# EAGLE board ASD2301 (EAGLE 6.3)
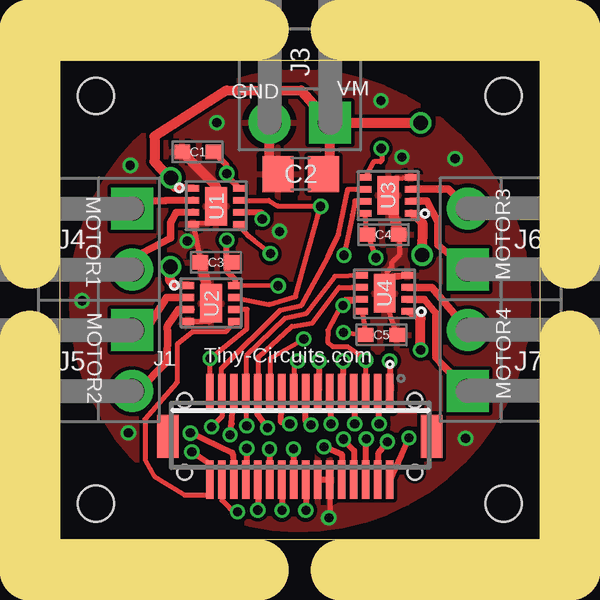
[diagram p0: board, top side]
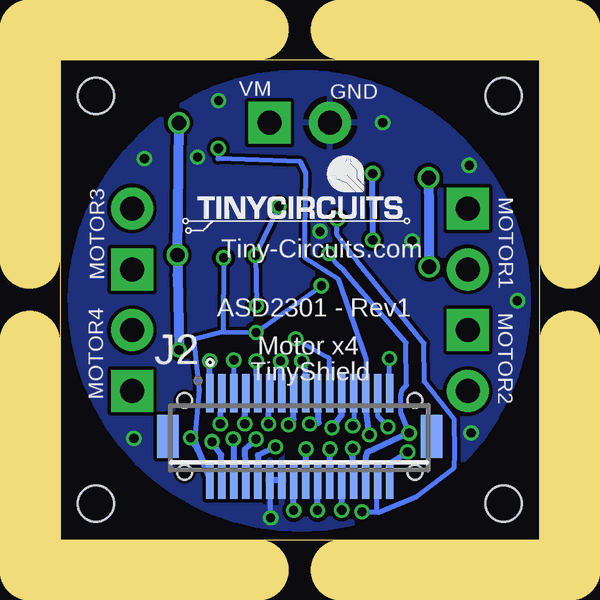
[diagram p1: board, bottom side, seen from below]

Size 20 x 20 mm. Coordinates in mm from the lower left corner, seen from the top.
Outline: 0,20 20,20 20,0 0,0 0,20
Copper layers (1*16): Top 0.035mm / dielectric 1.5mm / Bottom 0.035mm
Design rules "default *": minimum track width 8mil, minimum drill 15mil, track to track 6mil, track to pad 6mil, pad to pad 6mil, via to via 6mil, smd to smd 6mil, copper to edge 6mil, drill to drill 8mil, minimum pad ring 10mil, minimum via ring 5mil, stop-mask expansion 4mil, vias tented up to drill 25mil, thermal gap 10mil
Holes 1.5 mm at 1.5,18.5 18.5,18.5 18.5,1.5 1.5,1.5
Milling: 8 lines

## Footprints (pad centres in the part's own frame; a part is rotated, then mirrored left to right if it is on the bottom)
C0402 = smd 0.65 x 0.6: 1 -0.65,0; 2 0.65,0
C0805 = smd 1.3 x 1.5: 1 -0.95,0; 2 0.95,0
DF12-32-DP = smd 0.3 x 1.6: 1 -3.75,-1.8; 2 -3.75,1.8; 3 -3.25,-1.8; 4 -3.25,1.8; 5 -2.75,-1.8; 6 -2.75,1.8; 7 -2.25,-1.8; 8 -2.25,1.8; 9 -1.75,-1.8; 10 -1.75,1.8; 11 -1.25,-1.8; 12 -1.25,1.8; 13 -0.75,-1.8; 14 -0.75,1.8; 15 -0.25,-1.8; 16 -0.25,1.8; 17 0.25,-1.8; 18 0.25,1.8; 19 0.75,-1.8; 20 0.75,1.8; 21 1.25,-1.8; 22 1.25,1.8; 23 1.75,-1.8; 24 1.75,1.8; 25 2.25,-1.8; 26 2.25,1.8; 27 2.75,-1.8; 28 2.75,1.8; 29 3.25,-1.8; 30 3.25,1.8; 31 3.75,-1.8; 32 3.75,1.8 | smd 0.9 x 1.8: F1 -5.5,0; F2 5.5,0 | hole 0.6: -4.8,1.5; 4.8,1.5
DF12-32-DS = smd 0.3 x 1.6: 1 -3.75,1.8; 2 -3.75,-1.8; 3 -3.25,1.8; 4 -3.25,-1.8; 5 -2.75,1.8; 6 -2.75,-1.8; 7 -2.25,1.8; 8 -2.25,-1.8; 9 -1.75,1.8; 10 -1.75,-1.8; 11 -1.25,1.8; 12 -1.25,-1.8; 13 -0.75,1.8; 14 -0.75,-1.8; 15 -0.25,1.8; 16 -0.25,-1.8; 17 0.25,1.8; 18 0.25,-1.8; 19 0.75,1.8; 20 0.75,-1.8; 21 1.25,1.8; 22 1.25,-1.8; 23 1.75,1.8; 24 1.75,-1.8; 25 2.25,1.8; 26 2.25,-1.8; 27 2.75,1.8; 28 2.75,-1.8; 29 3.25,1.8; 30 3.25,-1.8; 31 3.75,1.8; 32 3.75,-1.8 | smd 0.9 x 1.8: F1 -5.5,0; F2 5.5,0 | hole 0.6: -4.8,1.5; 4.8,1.5
1X2_.1_RA_TH_HEADER = drill 1 pad 1.75 square: 1 0,1.27 | drill 1 pad 1.75: 2 0,-1.27
WSON-8 = smd 0.28 x 0.5: 1 -0.75,-0.95; 2 -0.25,-0.95; 3 0.25,-0.95; 4 0.75,-0.95; 5 0.75,0.95; 6 0.25,0.95; 7 -0.25,0.95; 8 -0.75,0.95 | smd 1.6 x 0.9: 9 0,0

## Placement (x,y rotation side)
C1  0.1uF  [C0402]  5.75,16.16 180 top
C2  10uF  [C0805]  10.04,15.25 180 top
C3  0.1uF  [C0402]  6.5,11.56 180 top
C4  0.1uF  [C0402]  13.48,12.72 0 top
C5  0.1uF  [C0402]  13.41,8.53 0 top
J1  DF12-32-DP  [DF12-32-DP]  10,4.3 180 top
J2  DF12-32-DS  [DF12-32-DS]  10,4.3 0 bottom
J3  961102  [1X2_.1_RA_TH_HEADER]  10,17.38 270 top
J4  961102  [1X2_.1_RA_TH_HEADER]  3,12.54 0 top
J5  961102  [1X2_.1_RA_TH_HEADER]  3,7.46 0 top
J6  961102  [1X2_.1_RA_TH_HEADER]  17,12.54 180 top
J7  961102  [1X2_.1_RA_TH_HEADER]  17,7.46 180 top
U1  DRV8837  [WSON-8]  6.51,13.9 270 top
U2  DRV8837  [WSON-8]  6.3,9.85 270 top
U3  DRV8837  [WSON-8]  13.69,14.36 90 top
U4  DRV8837  [WSON-8]  13.54,10.27 90 top
U$1  [DOCFIELD-TINYCIRCUITS-PCB]  33.91,-10 0 top  (outside the outline)

## Library data of the parts
C1 C3-C5 = tinycircuits; PARTNO: AS-ITM-00008
C2 = tinycircuits; PARTNO: AS-ITM-00045
J1 = tinycircuits; PARTNO: AS-ITM-00015
J2 = tinycircuits; PARTNO: AS-ITM-00012
J3-J7 = tinycircuits; PARTNO: AS-ITM-00044
U1-U4 = tinycircuits; PARTNO: AS-ITM-00042
U$1 = tinycircuits; NO_BOM: TRUE

## Nets
#SLEEP: J1.5 J2.5 U1.7 U2.7 U3.7 U4.7
+3V3: J1.6 J2.6
+5V: J1.8 J2.8
AD0: J1.11 J2.11
AD1: J1.9 J2.9
AD2: J1.7 J2.7
AD4/SDA: J1.3 J2.3
AD5/SCL: J1.1 J2.1
AREF: J1.13 J2.13
GND: C1.2 C2.2 C3.2 C4.2 C5.2 J1.12 J1.14 J2.12 J2.14 J3.2 U1.4 U1.9 U2.4 U2.9 U3.4 U3.9 U4.4 U4.9
IO0: J1.24 J2.24
IO1: J1.26 J2.26
MISO: J1.17 J2.17
MOSI: J1.19 J2.19
MOTOR1_DIR: J1.28 J2.28 U1.5
MOTOR1_PWM: J1.30 J2.30 U1.6
MOTOR2_DIR: J1.32 J2.32 U2.5
MOTOR2_PWM: J1.31 J2.31 U2.6
MOTOR3_DIR: J1.27 J2.27 U3.5
MOTOR3_PWM: J1.29 J2.29 U3.6
MOTOR4_DIR: J1.25 J2.25 U4.5
MOTOR4_PWM: J1.23 J2.23 U4.6
N$1: J4.1 U1.2
N$2: J4.2 U1.3
N$3: J5.1 U2.2
N$4: J5.2 U2.3
N$5: J6.1 U3.2
N$6: J6.2 U3.3
N$7: J7.1 U4.2
N$8: J7.2 U4.3
RESET: J1.22 J2.22
RSV0: J1.20 J2.20
RSV1: J1.18 J2.18
RSV2: J1.16 J2.16
SCK: J1.15 J2.15
SS: J1.21 J2.21
VBATT: J1.4 J2.4
VCC: C1.1 C3.1 C4.1 C5.1 J1.2 J2.2 U1.8 U2.8 U3.8 U4.8
VIN: J1.10 J2.10
VM: C2.1 J3.1 U1.1 U2.1 U3.1 U4.1

## Tracks (layer width: path | path; a pad name or v marks a point on that pad's centre or on a via)
#SLEEP  (via drill 0.38)
  Top 0.203: U3.7 12.65,14.12 12.29,14.12 12.19,13.54 v11.85,11.86 | v11.8,9.76 11.81,9.89 U4.7 11.87,10.01 11.17,8.72 11.16,8.22 11.38,8.05 11.98,8.04 12.01,8.04 12.36,7.8 12.44,7.73 v12.75,7.48 J2.5 | U2.7 8.72,9.8 9.83,10.13 v10.87,13.89 10.64,13.91 9.08,13.91 8.71,14.14 U1.7
  Top 0.254: U1.7
  Bottom 0.203: v11.8,9.76 v11.85,11.86 v10.87,13.89 | J2.5 v12.75,7.48
+3V3  (via drill 0.38)
  Top 0.254: J2.6 12.75,3.77 v12.77,4.2
  Bottom 0.254: v12.77,4.2 12.75,3.77 J2.6
+5V  (via drill 0.38)
  Top 0.254: v11.82,4.19 12.27,3.71 J2.8
  Bottom 0.254: J2.8 12.28,3.76 v11.82,4.19
AD0  (via drill 0.38)
  Top 0.254: v11.3,4.83 11.31,5.05 J2.11
  Bottom 0.254: J2.11 11.28,5.79 v11.3,4.83
AD1  (via drill 0.38)
  Top 0.254: J2.9 11.79,6.27 v11.81,7.44
  Bottom 0.254: v11.81,7.44 11.78,6.22 J2.9
AD2  (via drill 0.38)
  Top 0.254: v12.29,4.83 12.31,5.05 J2.7
  Bottom 0.254: J2.7 12.27,5.86 v12.29,4.83
AD4/SDA  (via drill 0.38)
  Top 0.254: v13.31,4.83 13.31,5 J2.3
  Bottom 0.254: J2.3 13.28,5.86 v13.31,4.83
AD5/SCL  (via drill 0.38)
  Top 0.254: J2.1 13.79,6.27 v13.75,7.45
  Bottom 0.254: v13.75,7.45 13.78,6.55 J2.1
AREF  (via drill 0.38)
  Top 0.254: J2.13 10.8,6.27 v10.8,7.44
  Bottom 0.254: v10.8,7.44 10.77,6.59 J2.13
GND  (via drill 0.38)
  Top 0.203: 14.46,12.76 14.48,12.76 C4.2 14.17,12.68 14.17,11.89 13.85,11.57 13.85,11.36 13.66,11.18 13.66,10.96 13.75,10.88 13.87,10.88 14,11.02 U4.4 13.59,10.87 U4.9 13.8,9.28 C5.2 | U3.9 13.77,15.02 U3.4 | U1.9 6.56,13.23 U1.4 C3.2 | J2.12 11.25,0.97 11.25,0.96 | U2.4 6.27,9.1 6.28,9.11 6.28,9.83 U2.9
  Top 0.254: J2.12 J2.14 | C2.2 8.73,15.61
  Top 0.406: C4.2 U3.9 | C3.2 U2.9 | C1.2 6.51,14.73 U1.9 | 8.73,15.61 J3.2
  Bottom 0.203: J2.12 11.25,0.94 v11.21,0.91
  Bottom 0.254: J2.12 J2.14
  other vias: 16.92,4.22 6.54,17.39 13.39,18.3 16.48,15.88 9.16,12.85 2.85,4.45 0.92,9.96 2.93,15.61 5.31,12.45 14.26,15.94
  pour Top: 18.49,5.61 arc180 1.54,14.32 arc180
  pour Bottom: 18.49,5.61 arc180 1.54,14.32 arc180
IO0  (via drill 0.38)
  Top 0.254: J2.24 8.25,1.26 v8.25,1.23
  Bottom 0.254: v8.25,1.23 J2.24
IO1  (via drill 0.38)
  Top 0.254: v7.79,3.8 J2.26
  Bottom 0.254: 7.8,3.6 J2.26 v7.79,3.8
MISO  (via drill 0.38)
  Top 0.203: v9.91,7.45 9.76,7.5 J2.17
  Bottom 0.203: J2.17 9.76,7.53 v9.91,7.45
MOSI  (via drill 0.38)
  Top 0.254: v9.58,4.83 9.22,4.89 J2.19
  Bottom 0.254: J2.19 9.21,4.87 v9.58,4.83
MOTOR1_DIR  (via drill 0.38)
  Top 0.203: v8.77,11.92 8.12,12.45 7.9,12.64 U1.5
  Top 0.254: v5.44,4.44 7.18,3.62 7.22,3.49 7.29,2.61 7.26,2.51 J2.28
  Bottom 0.203: v8.77,11.92 8.44,11.46 8.16,11.21 7.83,10.83 5.56,8.21 5.55,6.43 5.72,6.26 5.78,6.04 5.78,5.23 v5.44,4.44
  Bottom 0.254: J2.28 7.24,3.43 7.18,3.64 v5.44,4.44
MOTOR1_PWM  (via drill 0.38)
  Top 0.203: v8.44,13.37 8.44,13.55 | v7.41,1.15 7.34,1.1 7.34,1.04 6.75,1.63 J2.30 6.75,2.03 6.79,1.99
  Top 0.254: J2.30 | U1.6 8.39,13.65 8.44,13.55
  Bottom 0.203: 6.79,1.2 6.71,1.12 5.11,1.81 3.56,2.99 3.54,3.59 3.55,5.01 4.81,6.59 4.82,8.18 7.6,11.59 8.44,12.71 v8.44,13.37 | v7.41,1.15 6.84,1.15 6.79,1.2 | 6.79,1.2 6.79,2.46 J2.30
MOTOR2_DIR  (via drill 0.38)
  Top 0.203: U2.5 6.92,8.66 5.53,8.66 4.89,8.14 4.88,6.54 arc61 4.85,6.52 3.55,5.03 3.55,4.48 3.55,3.31 3.93,2.64 5.19,1.86 6.23,1.86 J2.32
  Top 0.254: J2.32 6.25,3.14 v5.5,3.65
  Bottom 0.254: v5.5,3.65 5.53,3.62 6.21,3.18 6.21,3.14 6.26,3.1 J2.32
MOTOR2_PWM  (via drill 0.38)
  Top 0.203: U2.6 7.8,9.6 7.8,8.8 v6.26,7.55 v6.27,7.54 6.27,7.54 6.25,7.52 J2.31
  Bottom 0.203: J2.31 v6.26,7.55
MOTOR3_DIR  (via drill 0.38)
  Top 0.203: v13.39,16.31 13.42,16.29 13.42,15.81 13.37,15.76 13.09,15.76 13.08,15.75 U3.5
  Top 0.254: v7.1,4.36 7.16,4.84 J2.27
  Bottom 0.203: J2.27 7.22,6.13 7.22,7.5 8.39,10.86 9.8,11.77 9.79,12.79 9.74,15.28 9.97,15.76 13.42,15.88 13.39,15.91 v13.39,16.31
  Bottom 0.254: J2.27 7.29,5.76 v7.1,4.36
MOTOR3_PWM  (via drill 0.38)
  Top 0.203: U3.6 12.01,14.61 11.62,12.72 11.57,12.61 11.26,11.97 11.17,11.77 10.07,9.77 9.19,9.57 6.74,7.14 6.76,6.11 J2.29 6.75,5.13 v6.32,4.7
  Top 0.254: J2.29
  Bottom 0.203: v6.32,4.7 v6.32,4.71 6.73,5.13 6.73,6.09 J2.29
MOTOR4_DIR  (via drill 0.38)
  Top 0.203: U4.5 12.63,11 11.46,10.97 10.26,9.41 9.38,9.23 7.77,7.65 J2.25 7.77,6.07 7.77,4.81 7.77,4.76 v7.79,4.74
  Bottom 0.203: J2.25 7.75,4.82 v7.79,4.74
MOTOR4_PWM  (via drill 0.38)
  Top 0.203: J2.23 8.26,6.11 8.28,7.62 9.66,8.89 10.53,9.04 11.65,10.51 12.17,10.52 U4.6
  Top 0.254: v8.66,4.65 8.24,5.24 J2.23
  Bottom 0.254: J2.23 8.24,5.22 v8.66,4.65
N$1
  Top 0.254: 3.34,14.11 3.06,14.03 J4.1
  Top 0.305: U1.2 4.4,14.13 3.34,14.11
N$2
  Top 0.254: 3.03,11.74 J4.2
  Top 0.305: U1.3 4.85,13.64 4.67,13.33 4.62,13.21 4.62,12.57 3.03,11.74
N$3
  Top 0.254: J5.1 3.16,8.87 3.16,8.95 3.72,8.95 | 5.37,10.1 U2.2
  Top 0.305: 3.72,8.95 4.44,10.1 5.37,10.1
N$4
  Top 0.254: J5.2 3.27,6.19 | 4.48,8.87 4.49,8.92 | 5.46,9.59 U2.3
  Top 0.305: 3.27,6.19 4.48,7.42 4.48,8.64 4.48,8.87 | 4.49,8.92 4.94,9.59 5.46,9.59
N$5
  Top 0.305: J6.1 15.77,12.28 15.76,13.24 15.3,14.11 U3.2
N$6
  Top 0.203: 15.58,14.61 15.57,14.61
  Top 0.305: J6.2 16.2,14.61 15.58,14.61 | 15.57,14.61 U3.3
N$7
  Top 0.203: 15.91,7.33 15.88,7.35
  Top 0.305: J7.1 15.91,7.33 | 15.88,7.35 15.68,7.6 15.68,9.43 15.2,10.01 U4.2
N$8
  Top 0.305: J7.2 15.51,10.52 U4.3
RESET  (via drill 0.38)
  Top 0.254: v8.74,3.77 J2.22
  Bottom 0.254: J2.22 8.75,3.69 v8.74,3.77
RSV0  (via drill 0.38)
  Top 0.254: J2.20 9.25,1.2 v9.26,1.22
  Bottom 0.254: v9.26,1.22 J2.20
RSV1  (via drill 0.38)
  Top 0.254: v9.74,3.77 9.74,2.51 J2.18
  Bottom 0.254: J2.18 9.75,3.72 v9.74,3.77
RSV2  (via drill 0.38)
  Top 0.254: J2.16 10.25,1.16 v10.25,1.22
  Bottom 0.254: v10.25,1.22 J2.16
SCK  (via drill 0.38)
  Top 0.254: v10.47,4.78 10.24,4.99 J2.15
  Bottom 0.254: J2.15 10.25,5.03 v10.47,4.78
SS  (via drill 0.38)
  Top 0.203: J2.21 8.77,7.56 v10.17,8.36
  Bottom 0.203: v10.17,8.36 8.78,7.57 J2.21
VBATT  (via drill 0.38)
  Top 0.254: v13.66,4.08 13.27,3.59 J2.4
  Bottom 0.254: J2.4 13.28,3.54 v13.66,4.08
VCC  (via drill 0.38)
  Top 0.203: U3.8 12.76,12.92 C4.1 v13.18,11.75 | U4.8 C5.1 v11.83,8.64 | v9.1,10.58 U2.8
  Top 0.254: J2.2 14.24,3.54 v14.55,4.24 | U2.8 7.31,10.61 7.3,10.85 6.96,11.19 C3.1 6.96,11.56 v6.96,12.49 | C1.1 6.94,15.62 v6.96,15.27 6.94,15.17 U1.8
  Bottom 0.203: v13.18,11.75 13.2,8.66 | 13.2,8.66 v11.83,8.64 v9.1,10.58 | 13.2,8.66 14.42,8.35 14.21,6.23 14.38,4.17 J2.2
  Bottom 0.254: v14.55,4.24 14.15,3.53 J2.2 | v6.96,12.49 6.94,12.42 v6.96,15.27
VIN  (via drill 0.38)
  Top 0.254: J2.10 11.77,3.52 v11.01,3.87
  Bottom 0.254: v11.01,3.87 11.75,3.52 J2.10
VM  (via drill 0.38, 0.6)
  Top 0.203: 15.09,11.87 v15.11,11.86 | U1.1 5.54,14.69
  Top 0.254: C2.1 11.27,15.22 11.07,15.22 | U2.1 | v4.63,15.09 4.47,15.28 4.59,15.08
  Top 0.305: 15.04,9.21 U4.1 | U3.1 15.11,13.2 | 4.79,14.72 U1.1 | U2.1 4.79,10.61
  Top 0.406: 11.27,15.22 J3.1 | J3.1 v15.04,17.38 | v15.04,7.91 15.04,9.21 | 15.11,13.2 15.09,11.87 | J3.1 10.07,18.72 6.96,18.73 3.95,16.82 3.95,15.76 4.59,15.08 4.79,14.72 | 4.79,10.61 4.6,10.8 v4.6,11.37
  Bottom 0.254: v4.6,11.37 v4.6,11.38 | 4.61,15.03 v4.63,15.09
  Bottom 0.406: v15.04,17.38 v15.11,11.86 15.09,11.03 v15.04,7.91 | v4.6,11.38 4.6,13.77 4.61,15.03

## Text on the board
tPlace: VM | GND | MOTOR1 | MOTOR3 | MOTOR2 | Tiny-Circuits.com | MOTOR4
bPlace: GND | VM | MOTOR1 | Tiny-Circuits.com | MOTOR3 | ASD2301 - Rev1 | MOTOR2 | Motor x4 | TinyShield | MOTOR4
Document: FABRICATION DRAWING | NOTES: | 1. PRINTED CIRCUIT BOARD MADE FROM NEMA GRADE FR-4 EPOXY LAMINATE | WITH 1 OUNCE COPPER PLATING AND .024 THICKNESS. | 2. ALL DIMENSIONS ARE GIVEN IN INCHES. | 3. CIRCUIT PATHS ARE FOR REFERENCE ONLY. | 4. HOLE SIZES SHOWN ARE FINISHED DIAMETERS AFTER PLATING. | 5. BOARD PLATED USING REFLOW OR SIMILAR METHOD. | 6. BOARD TO HAVE BLUE SOLDER MASK ON PLATED SURFACES USING WET FILM | 7. SILKSCREEN BOARD USING WHITE INK. | SR100 OR SR1010 EPOXY. EQUIVALENT WET OR DRY FILM MAY BE USED. | 8. THE FOLLOWING INFORMATION APPLIES TO THIS BOARD: | * 2 COPPER LAYERS | * .024 BOARD THICKNESS | * REQUIRES TOP SIDE SILKSCREEN | Released under the Creative Commons Attribution Share-Alike 3.0 License | http://creativecommons.org/licenses/by-sa/3.0 | Original Arduino Uno Design by Team Arduino | LilyPad Arduino Design by Leah Buechley and Sparkfun Electronics | TinyDuino, TinyLily and TinyShield Designs by TinyCircuits | TinyShield - Motor (x4) | AS-PCB-ASD2301 | 1